# EAGLE board Relay_orig2 (EAGLE 9.1.2)
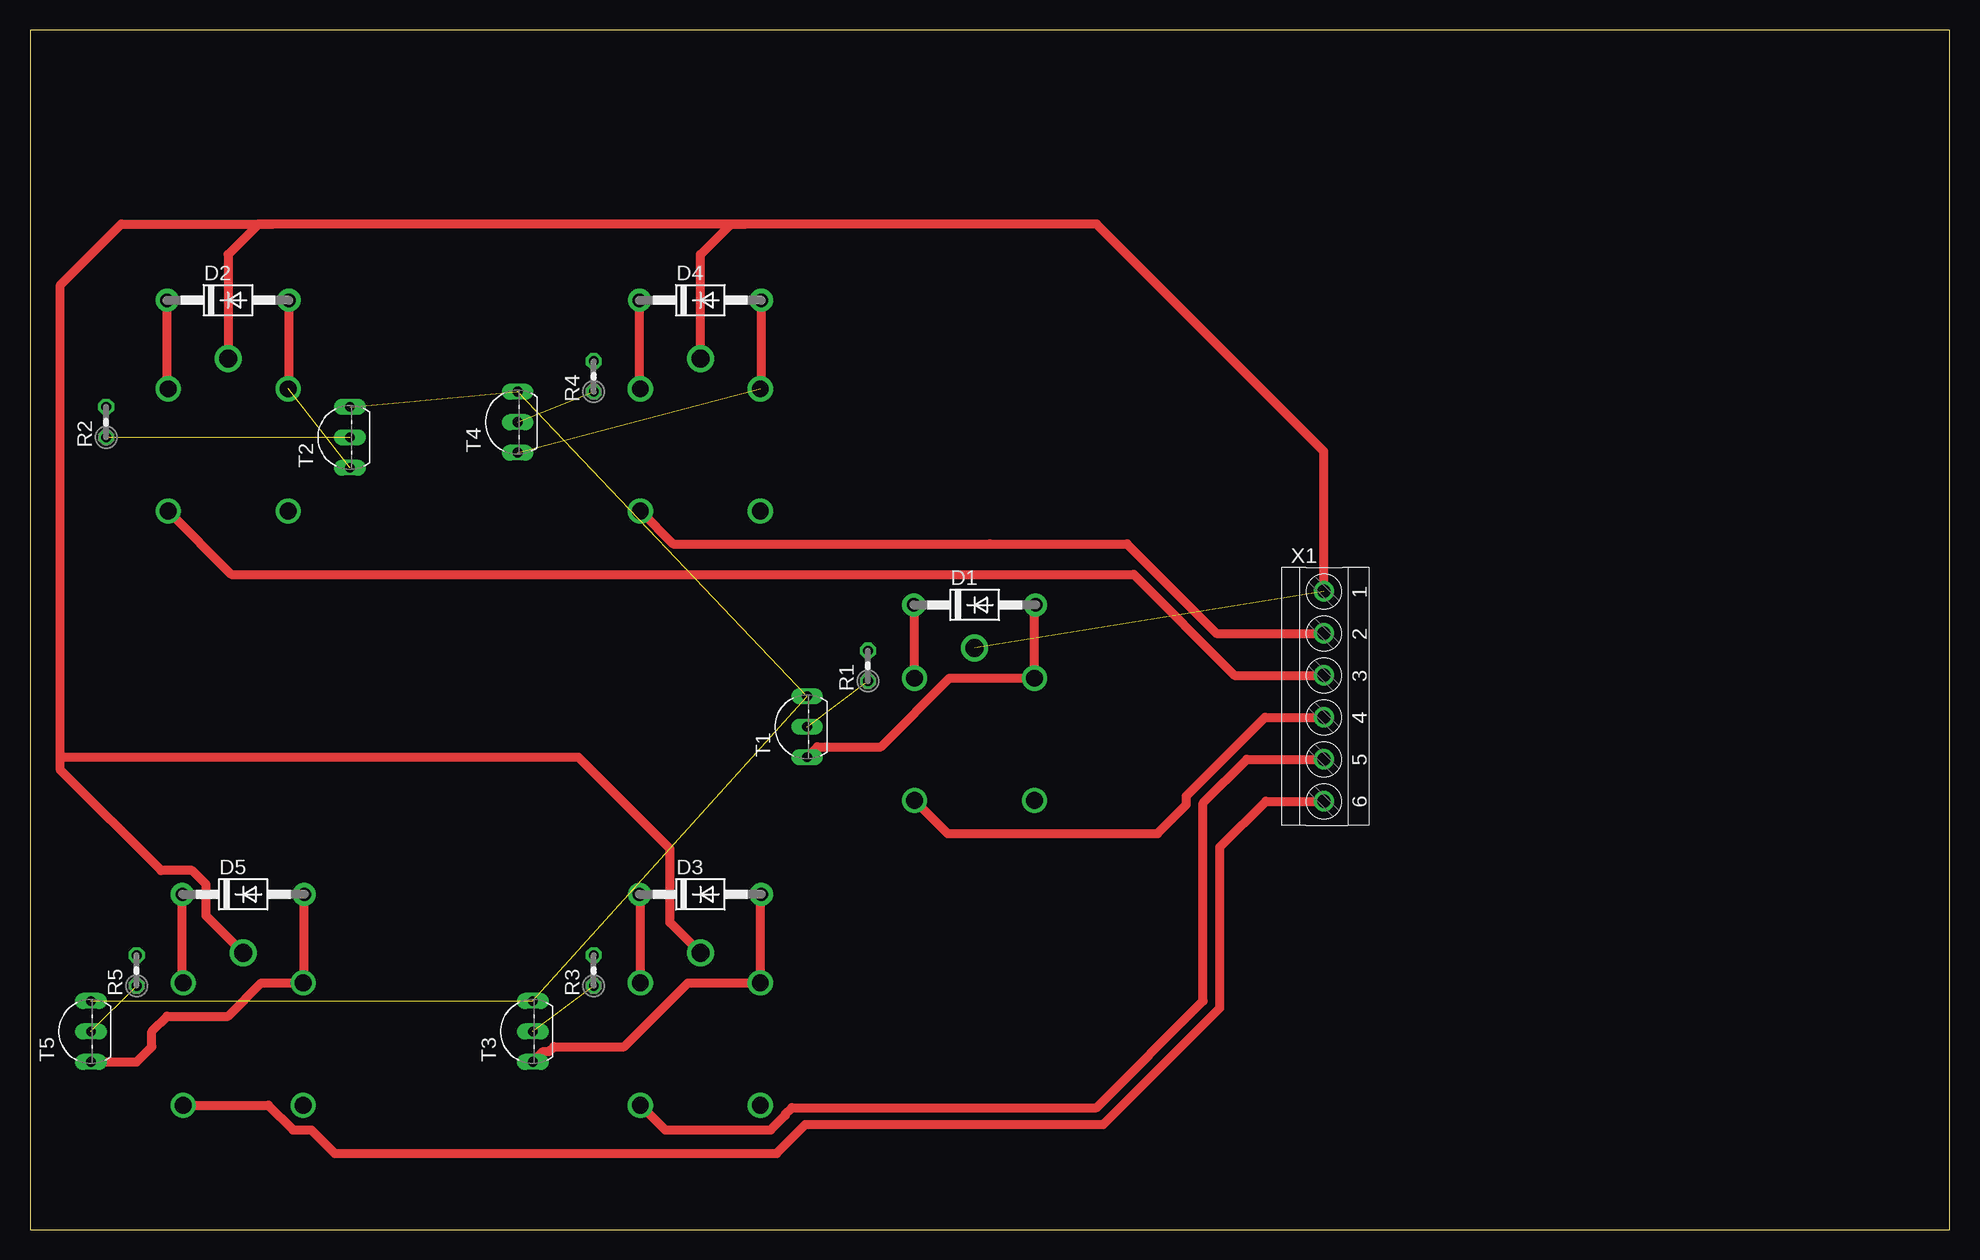
[diagram p0: board, top side]
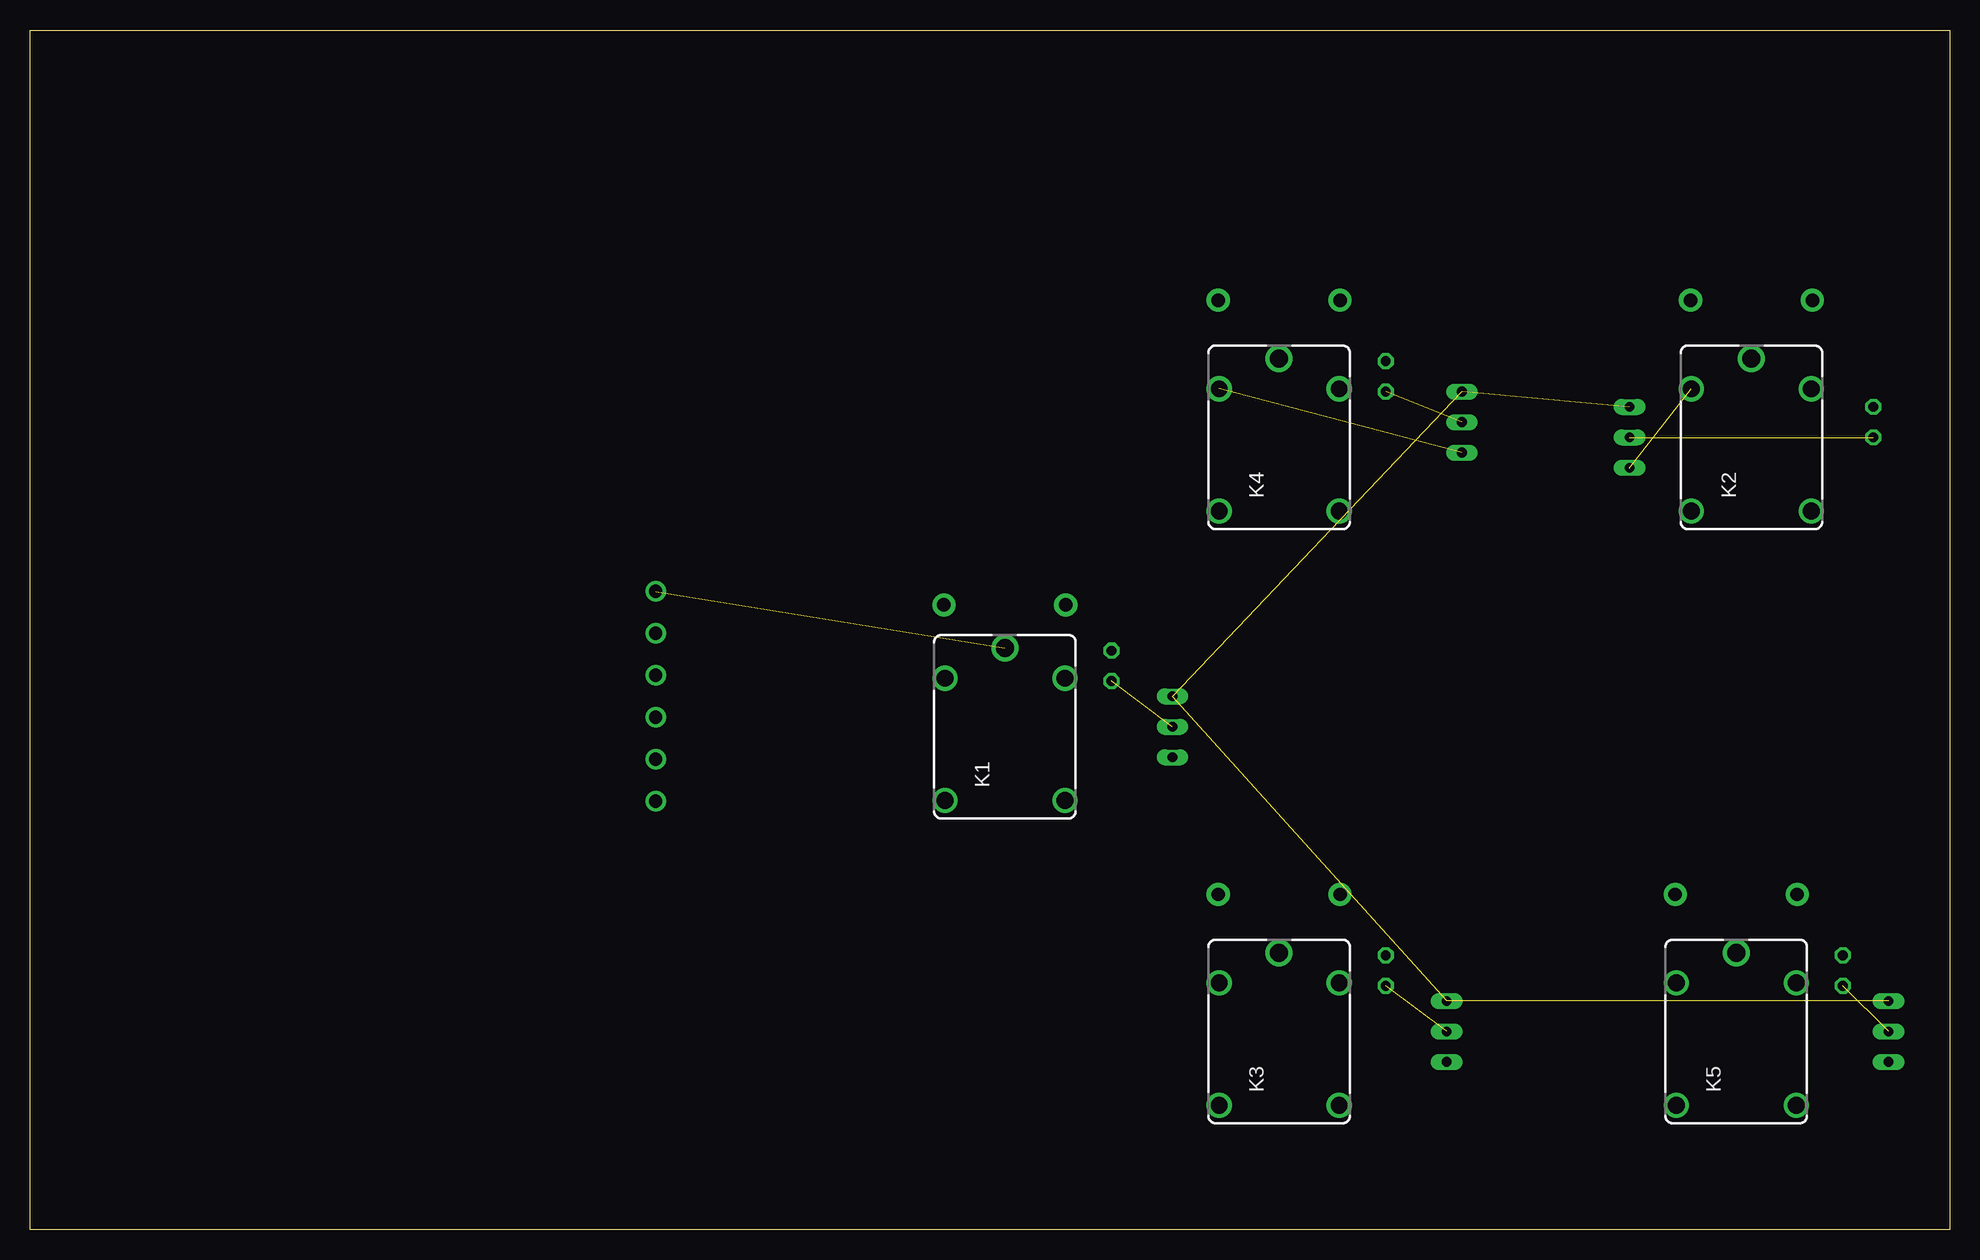
[diagram p1: board, bottom side, seen from below]

Size 160 x 100 mm. Coordinates in mm from the lower left corner, seen from the top.
Outline: 0,0 160,0 160,100 0,100 0,0
Copper layers (1*16): Top 0.035mm / dielectric 1.5mm / Bottom 0.035mm
Design rules "default": minimum track width 6mil, minimum drill 0.35mm, track to track 6mil, track to pad 6mil, pad to pad 6mil, via to via 6mil, smd to smd 6mil, copper to edge 40mil, drill to drill 6mil, minimum pad ring 10mil, minimum via ring 8mil, stop-mask expansion 4mil, vias tented up to drill 0mil, thermal gap 10mil
Net classes: 1 Power: width 0.762 mm, drill 0.762 mm, clearance 0.635 mm; 2 Data: width 0.762 mm, drill 0.762 mm, clearance 0.635 mm

## Footprints (pad centres in the part's own frame; a part is rotated, then mirrored left to right if it is on the bottom)
DO41-10 = drill 1.118 pad 1.93: A 5.08,0; C -5.08,0
JJM = drill 1.4: 1 4.05,5; 2 4.05,-5; NO1 -6.15,5; NO2 -6.15,-5 | drill 1.5: C 6.55,0
0204V = drill 0.813 octagon: 1 -1.27,0; 2 1.27,0
TO92-EBC-OVAL = drill 0.813 long: B 0,-1.27; C 2.54,-1.27; E -2.54,-1.27
TERMINAL-BLOCK-6-PIN-3.5MM-ROUND-PAD = drill 1.1 pad 1.7: 1 -8.75,-0.1; 2 -5.25,-0.1; 3 -1.75,-0.1; 4 1.75,-0.1; 5 5.25,-0.1; 6 8.75,-0.1

## Placement (x,y rotation side)
D1  1N4004  [DO41-10]  78.74,52.07 0 top
D2  1N4004  [DO41-10]  16.51,77.47 0 top
D3  1N4004  [DO41-10]  55.88,27.94 0 top
D4  1N4004  [DO41-10]  55.88,77.47 0 top
D5  1N4004  [DO41-10]  17.78,27.94 0 top
K1  JJM2W-5V  [JJM]  78.74,41.91 90 bottom
K2  JJM2W-5V  [JJM]  16.51,66.04 90 bottom
K3  JJM2W-5V  [JJM]  55.88,16.51 90 bottom
K4  JJM2W-5V  [JJM]  55.88,66.04 90 bottom
K5  JJM2W-5V  [JJM]  17.78,16.51 90 bottom
R1  [0204V]  69.85,46.99 90 top
R2  [0204V]  6.35,67.31 90 top
R3  [0204V]  46.99,21.59 90 top
R4  [0204V]  46.99,71.12 90 top
R5  [0204V]  8.89,21.59 90 top
T1  2N2222  [TO92-EBC-OVAL]  63.5,41.91 90 top
T2  2N2222  [TO92-EBC-OVAL]  25.4,66.04 90 top
T3  2N2222  [TO92-EBC-OVAL]  40.64,16.51 90 top
T4  2N2222  [TO92-EBC-OVAL]  39.37,67.31 90 top
T5  2N2222  [TO92-EBC-OVAL]  3.81,16.51 90 top
X1  TERMINAL-BLOCK-3.5MM-6-PIN-ROUND-PAD  [TERMINAL-BLOCK-6-PIN-3.5MM-ROUND-PAD]  107.95,44.45 270 top

## Library data of the parts
D1-D5 R1-R5 T1-T5 = adafruit
K1-K5 = relay; OC_FARNELL: unknown; OC_NEWARK: unknown
X1 = Rembrandt Electronics - Terminal Block 3-5mm v1-0

## Nets
GND [Power]: T1.C T2.C T3.C T4.C T5.C
N$1 [Data]: D1.A K1.1 T1.E
N$2 [Data]: R1.1 T1.B
N$3 [Data]: D2.A K2.1 T2.E
N$4 [Data]: R3.1 T3.B
N$5 [Data]: R2.1 T2.B
N$6 [Data]: D2.C K2.2
N$7 [Data]: D1.C K1.2
N$8 [Data]: D3.C K3.2
N$9 [Data]: D3.A K3.1 T3.E
N$10 [Data]: D4.C K4.2
N$11 [Data]: D4.A K4.1 T4.E
N$12 [Data]: R4.1 T4.B
N$13 [Data]: R1.2
N$14 [Data]: R5.1 T5.B
N$15 [Data]: D5.C K5.2
N$16 [Data]: D5.A K5.1 T5.E
N$26 [Data]: K5.NO2 X1.6
N$27 [Data]: K3.NO2 X1.5
N$28 [Data]: K1.NO2 X1.4
N$29 [Data]: K4.NO2 X1.2
N$31 [Data]: K2.NO2 X1.3
VCCA [Power]: K1.C K2.C K3.C K4.C K5.C X1.1

## Tracks (layer width: path | path; a pad name or v marks a point on that pad's centre or on a via)
GND  (4 unrouted)
N$1
  Top 0.762: D1.A 83.74,51.99 K1.1 76.66,45.96 70.94,40.23 65.63,40.23 T1.E
N$2  (1 unrouted)
N$3  (1 unrouted)
  Top 0.762: K2.1 21.59,70.17 D2.A
N$4  (1 unrouted)
N$5  (1 unrouted)
N$6
  Top 0.762: K2.2 11.43,70.17 D2.C
N$7
  Top 0.762: K1.2 73.74,51.99 D1.C
N$8
  Top 0.762: K3.2 50.88,27.86 D3.C
N$9
  Top 0.762: D3.A 60.88,27.86 K3.1 54.85,20.56 49.53,15.24 43.67,15.24 43.27,14.83 42.77,14.83 T3.E
N$10
  Top 0.762: K4.2 50.8,70.17 D4.C
N$11  (1 unrouted)
  Top 0.762: K4.1 60.96,70.17 D4.A
N$12  (1 unrouted)
N$14  (1 unrouted)
N$15
  Top 0.762: K5.2 12.7,20.64 D5.C
N$16
  Top 0.762: D5.A 22.86,20.64 K5.1 19.29,20.56 16.51,17.78 11.43,17.78 10.16,16.51 10.16,15.24 8.89,13.97 T5.E
N$26
  Top 0.762: K5.NO2 19.86,10.36 21.92,8.29 23.46,8.29 25.4,6.35 62.23,6.35 64.64,8.76 89.48,8.76 99.19,18.47 99.19,31.88 103.01,35.7 X1.6
N$27
  Top 0.762: K3.NO2 52.95,8.29 61.74,8.29 62.95,9.5 62.95,9.61 63.5,10.16 88.9,10.16 97.79,19.05 97.79,35.56 101.43,39.2 X1.5
N$28
  Top 0.762: K1.NO2 76.48,33.02 93.98,33.02 96.39,35.43 96.39,36.14 102.95,42.7 X1.4
N$29
  Top 0.762: K4.NO2 53.62,57.15 80.01,57.15 91.44,57.15 98.89,49.7 X1.2
N$31
  Top 0.762: K2.NO2 16.79,54.61 92,54.61 100.41,46.2 X1.3
VCCA  (1 unrouted)
  Top 0.762: X1.1 107.85,64.87 88.9,83.82 59.69,83.82 | 59.69,83.82 20.32,83.82 | 20.32,83.82 19.05,83.82 16.51,81.28 K2.C | K4.C 55.88,81.28 58.42,83.82 59.69,83.82 | K5.C 14.68,26.16 14.68,28.76 13.52,29.92 10.92,29.92 2.54,38.3 2.54,39.37 | 20.32,83.82 7.62,83.82 2.54,78.74 2.54,39.37 | K3.C 53.34,25.6 53.34,31.75 45.72,39.37 2.54,39.37